# EAGLE board 11-1121-1 ABC GPIO RELAY (EAGLE 9.6.2)
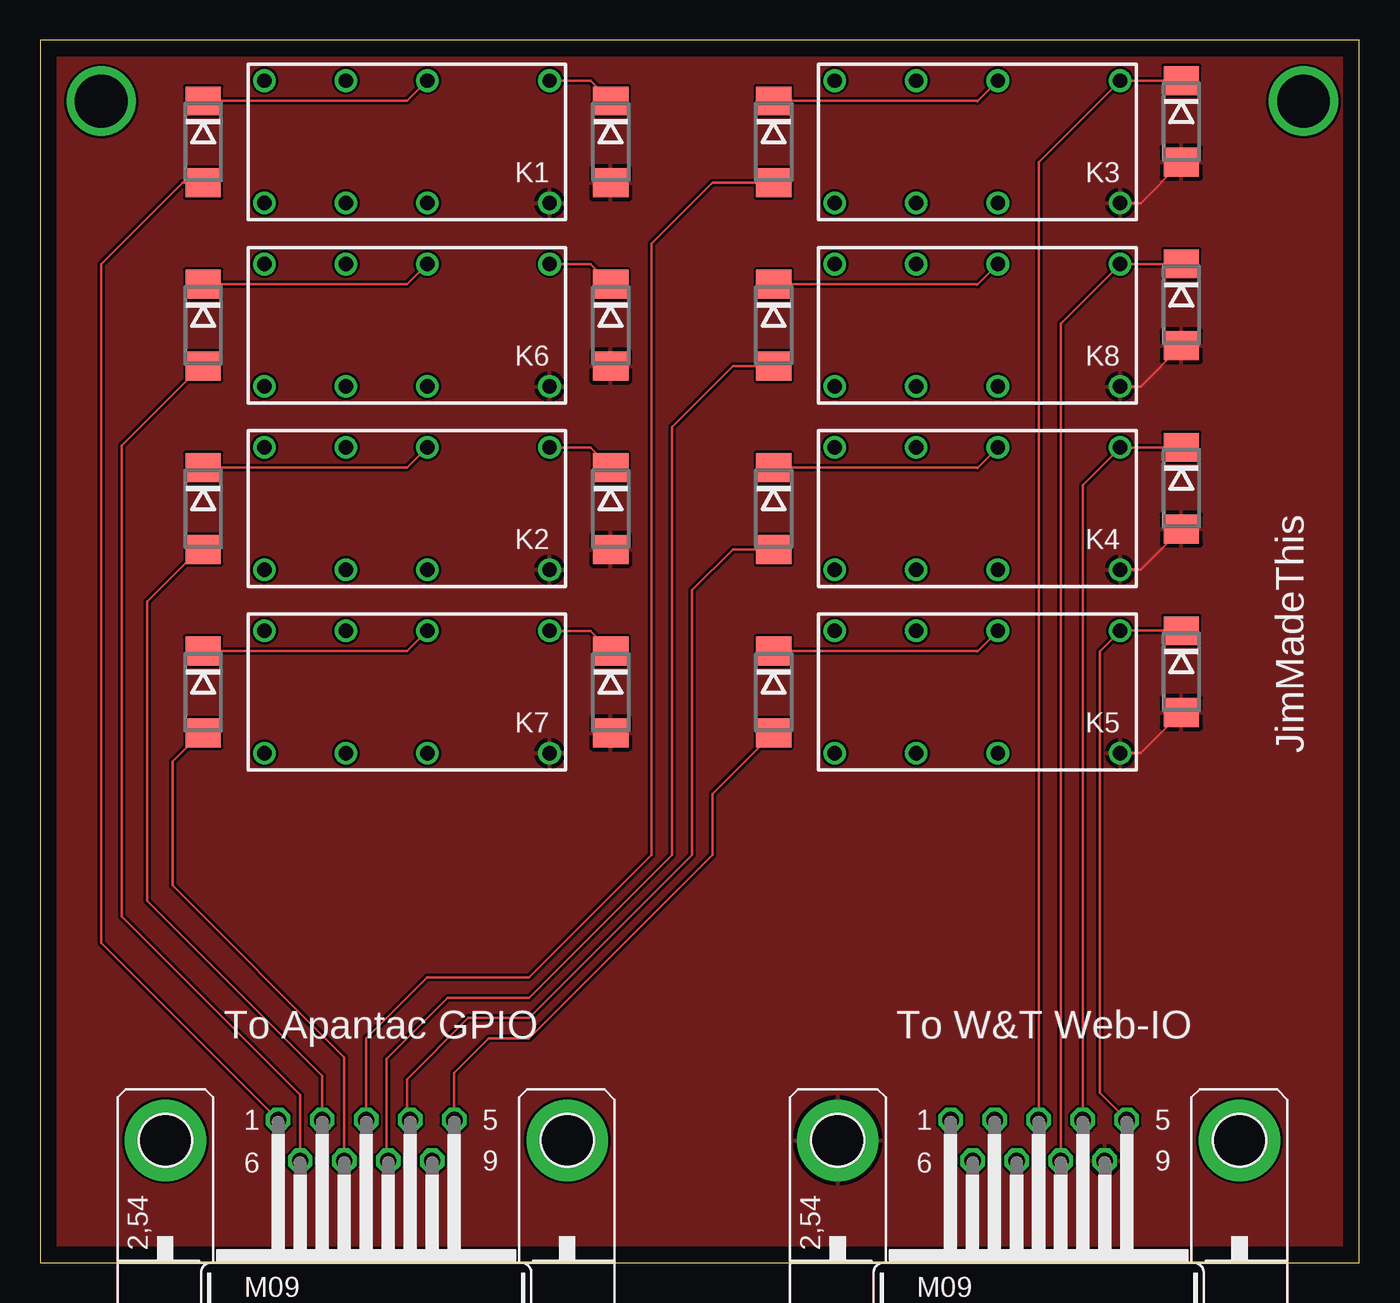
[diagram p0: board, top side]
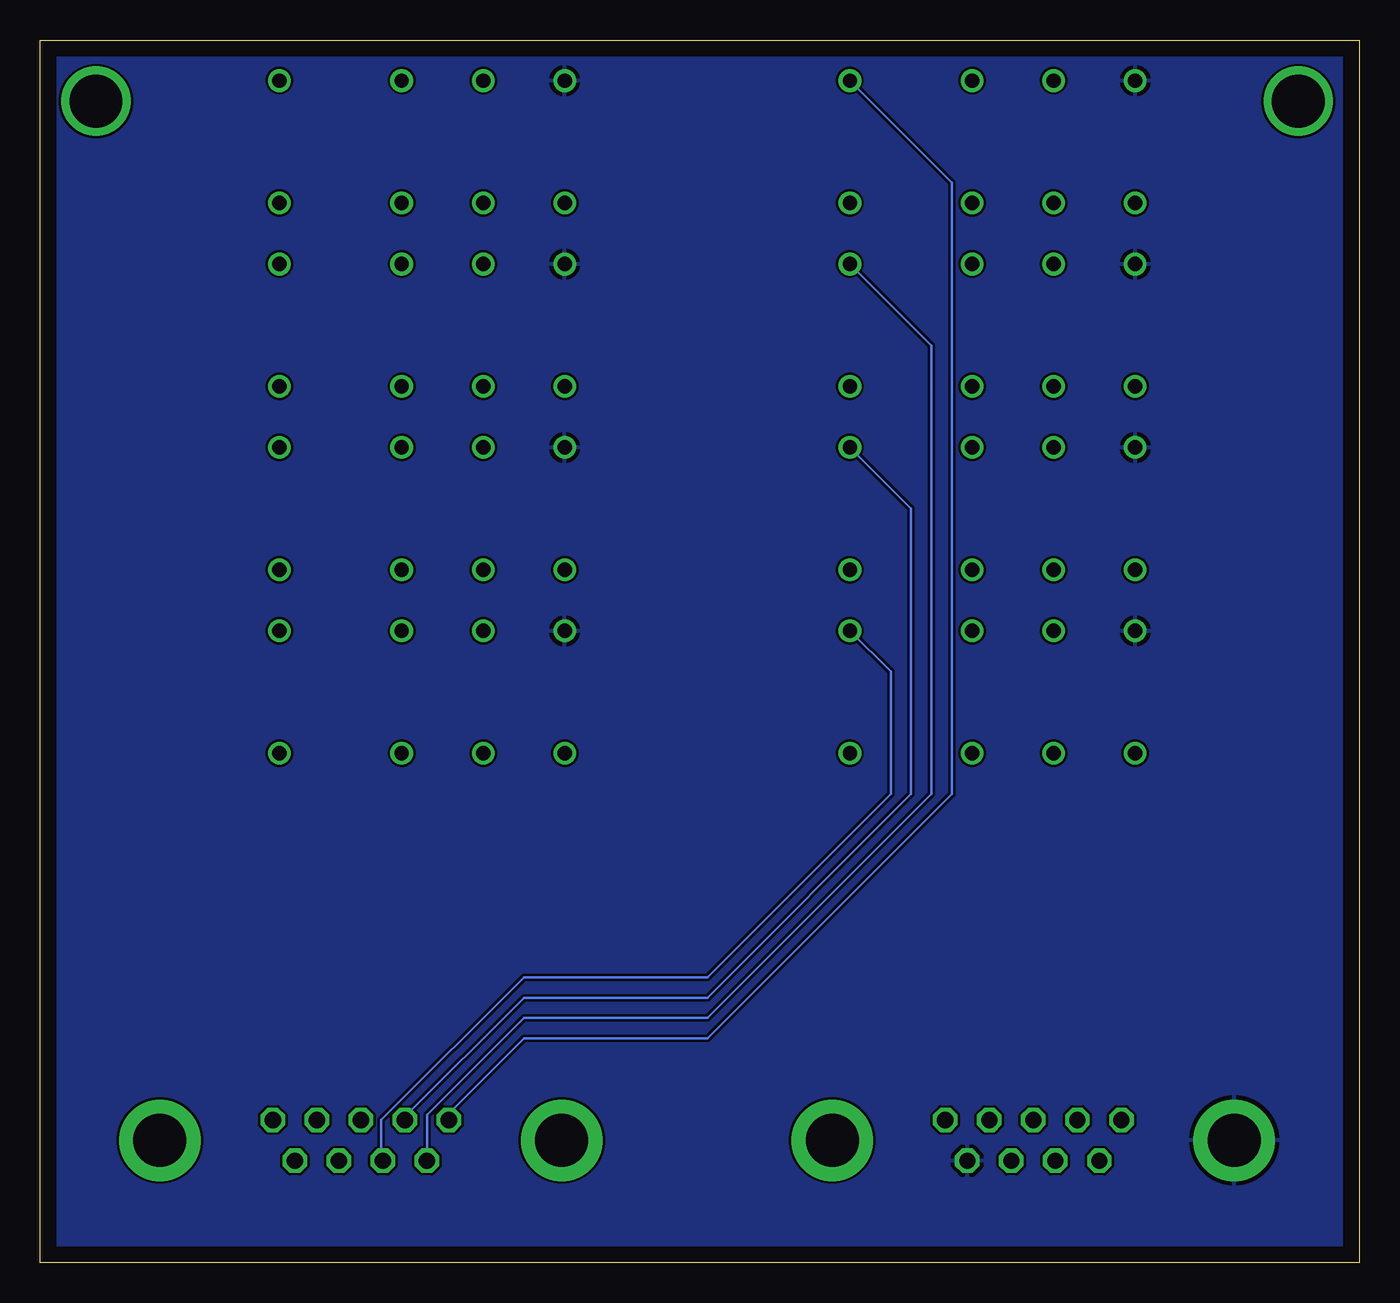
[diagram p1: board, bottom side, seen from below]

Size 82.22 x 76.19 mm. Coordinates in mm from the lower left corner, seen from the top.
Outline: 0,0 82.22,0 82.22,76.19 0,76.19 0,0
Copper layers (1*16): Top 0.035mm / dielectric 1.5mm / Bottom 0.035mm
Design rules "default": minimum track width 6mil, minimum drill 0.35mm, track to track 6mil, track to pad 6mil, pad to pad 6mil, via to via 6mil, smd to smd 6mil, copper to edge 40mil, drill to drill 6mil, minimum pad ring 10mil, minimum via ring 8mil, stop-mask expansion 4mil, vias tented up to drill 0mil, thermal gap 10mil

## Footprints (pad centres in the part's own frame; a part is rotated, then mirrored left to right if it is on the bottom)
DO214AA = smd 1.8 x 2.2: A 2.55,0; C -2.55,0
DS2Y = drill 0.9: 1 -8.89,-3.81; 4 -1.27,-3.81; 6 3.81,-3.81; 8 8.89,-3.81; 9 8.89,3.81; 11 3.81,3.81; 13 -1.27,3.81; 16 -8.89,3.81
M09HP = drill 1.016 octagon: 1 -5.486,1.27; 2 -2.743,1.27; 3 0,1.27; 4 2.743,1.27; 5 5.486,1.27; 6 -4.115,-1.27; 7 -1.372,-1.27; 8 1.372,-1.27; 9 4.115,-1.27 | drill 3.302 pad 5.08: G1 -12.522,0; G2 12.522,0

## Placement (x,y rotation side)
D1  [DO214AA]  10.16,69.85 270 top
D2  [DO214AA]  10.16,46.99 270 top
D3  [DO214AA]  45.72,69.85 270 top
D4  [DO214AA]  45.72,46.99 270 top
D5  [DO214AA]  45.72,35.56 270 top
D6  [DO214AA]  10.16,58.42 270 top
D7  [DO214AA]  10.16,35.56 270 top
D8  [DO214AA]  45.72,58.42 270 top
D13  [DO214AA]  35.56,69.85 270 top
D14  [DO214AA]  35.56,46.99 270 top
D15  [DO214AA]  71.12,71.12 270 top
D16  [DO214AA]  71.12,48.26 270 top
D17  [DO214AA]  71.12,36.83 270 top
D18  [DO214AA]  35.56,58.42 270 top
D19  [DO214AA]  35.56,35.56 270 top
D20  [DO214AA]  71.12,59.69 270 top
K1  DS2Y-S-DC12V  [DS2Y]  22.86,69.85 180 top
K2  DS2Y-S-DC12V  [DS2Y]  22.86,46.99 180 top
K3  DS2Y-S-DC12V  [DS2Y]  58.42,69.85 180 top
K4  DS2Y-S-DC12V  [DS2Y]  58.42,46.99 180 top
K5  DS2Y-S-DC12V  [DS2Y]  58.42,35.56 180 top
K6  DS2Y-S-DC12V  [DS2Y]  22.86,58.42 180 top
K7  DS2Y-S-DC12V  [DS2Y]  22.86,35.56 180 top
K8  DS2Y-S-DC12V  [DS2Y]  58.42,58.42 180 top
TO-T#  [M09HP]  20.32,7.62 0 top
TO-W+T  [M09HP]  62.23,7.62 0 top

## Library data of the parts
D1-D8 D13-D20 = diode
K1-K8 = relay; MPN: DS2Y-S-DC12V; OC_FARNELL: unknown; OC_NEWARK: 13P3261
TO-T# TO-W+T = con-subd; OC_FARNELL: unknown; OC_NEWARK: unknown

## Nets
GND: D13.A D14.A D15.A D16.A D17.A D18.A D19.A D20.A K1.16 K2.16 K3.16 K4.16 K5.16 K6.16 K7.16 K8.16 TO-W+T.9 TO-W+T.G1
GND2: K1.8 K2.8 K3.8 K4.8 K5.8 K6.8 K7.8 K8.8 TO-T#.9 TO-T#.G1
N$1: D13.C K1.1 TO-W+T.1
N$2: D1.A TO-T#.1
N$3: D2.A TO-T#.2
N$4: D3.A TO-T#.3
N$5: D4.A TO-T#.4
N$6: D5.A TO-T#.5
N$7: D6.A TO-T#.6
N$8: D7.A TO-T#.7
N$9: D8.A TO-T#.8
N$10: D14.C K2.1 TO-W+T.2
N$11: D15.C K3.1 TO-W+T.3
N$12: D16.C K4.1 TO-W+T.4
N$13: D17.C K5.1 TO-W+T.5
N$14: D18.C K6.1 TO-W+T.6
N$15: D19.C K7.1 TO-W+T.7
N$16: D20.C K8.1 TO-W+T.8
N$17: D1.C K1.4
N$19: D2.C K2.4
N$21: D3.C K3.4
N$23: D4.C K4.4
N$25: D5.C K5.4
N$26: D6.C K6.4
N$27: D7.C K7.4
N$29: D8.C K8.4

## Tracks (layer width: path | path; a pad name or v marks a point on that pad's centre or on a via)
GND
  Top 0.152: D17.A 68.59,31.75 K5.16 | D16.A 68.59,43.18 K4.16 | D20.A 68.59,54.61 K8.16 | D15.A 68.59,66.04 K3.16
  pour Top: 0,0 0,76.2 82.55,76.2 82.55,0
GND2
  pour Bottom: 0,0 0,76.2 82.55,76.2 82.55,0
N$1
  Top 0.152: K1.1 34.3,73.66 D13.C
  Bottom 0.152: K1.1 25.4,67.31 25.4,29.21 40.64,13.97 52.07,13.97 56.74,9.3 TO-W+T.1
N$2
  Top 0.152: TO-T#.1 3.81,19.91 3.81,62.23 8.88,67.3 D1.A
N$3
  Top 0.152: D2.A 9.91,44.44 6.67,41.21 6.67,22.54 17.58,11.63 TO-T#.2
N$4
  Top 0.152: D3.A 41.9,67.3 38.1,63.5 38.1,25.4 30.48,17.78 24.13,17.78 20.32,13.97 TO-T#.3
N$5
  Top 0.152: D4.A 43.17,44.44 40.64,41.91 40.64,25.4 30.48,15.24 26.67,15.24 22.86,11.43 22.86,9.09 TO-T#.4
N$6
  Top 0.152: D5.A 41.91,29.2 41.91,25.4 30.48,13.97 27.94,13.97 25.81,11.84 TO-T#.5 25.81,9.3
N$7
  Top 0.152: TO-T#.6 16.2,10.46 5.08,21.59 5.08,50.92 10.03,55.87 D6.A
N$8
  Top 0.152: D7.A 10.03,33.01 8.26,31.23 8.26,23.5 18.95,12.8 TO-T#.7
N$9
  Top 0.152: D8.A 43.17,55.87 39.37,52.07 39.37,25.4 30.48,16.51 25.4,16.51 21.59,12.7 21.59,6.45 TO-T#.8
N$10
  Top 0.152: K2.1 34.3,50.8 D14.C
  Bottom 0.152: K2.1 27.94,46.99 27.94,29.21 40.64,16.51 52.07,16.51 59.59,8.99 TO-W+T.2
N$11
  Top 0.152: TO-W+T.3 62.23,68.58 K3.1 D15.C
N$12
  Top 0.152: TO-W+T.4 64.97,48.46 K4.1 D16.C
N$13
  Top 0.152: TO-W+T.5 66.04,10.57 66.04,38.1 K5.1 D17.C
N$14
  Top 0.152: K6.1 34.3,62.23 D18.C
  Bottom 0.152: TO-W+T.6 58.12,9.2 52.07,15.24 40.64,15.24 26.67,29.21 26.67,57.15 K6.1
N$15
  Top 0.152: K7.1 34.3,39.37 D19.C
  Bottom 0.152: TO-W+T.7 60.96,6.45 60.96,8.89 52.07,17.78 40.64,17.78 29.21,29.21 29.21,36.83 K7.1
N$16
  Top 0.152: TO-W+T.8 63.6,58.52 K8.1 D20.C
N$17
  Top 0.152: D1.C 22.87,72.4 K1.4
N$18  (via drill 3.3)
  other vias: 3.81,72.39
N$19
  Top 0.152: D2.C 22.87,49.54 K2.4
N$20  (via drill 3.3)
  other vias: 78.74,72.39
N$21
  Top 0.152: D3.C 58.41,72.4 58.42,72.39 K3.4
N$23
  Top 0.152: D4.C 58.41,49.54 58.42,49.53 K4.4
N$25
  Top 0.152: D5.C 58.41,38.11 58.42,38.1 K5.4
N$26
  Top 0.152: D6.C 22.87,60.97 K6.4
N$27
  Top 0.152: D7.C 22.87,38.11 K7.4
N$29
  Top 0.152: D8.C 58.41,60.97 58.42,60.96 K8.4

## Text on the board
tNames: JimMadeThis | To Apantac GPIO | To W&T Web-IO